# EAGLE board Main_Logic (EAGLE 7.7.0)
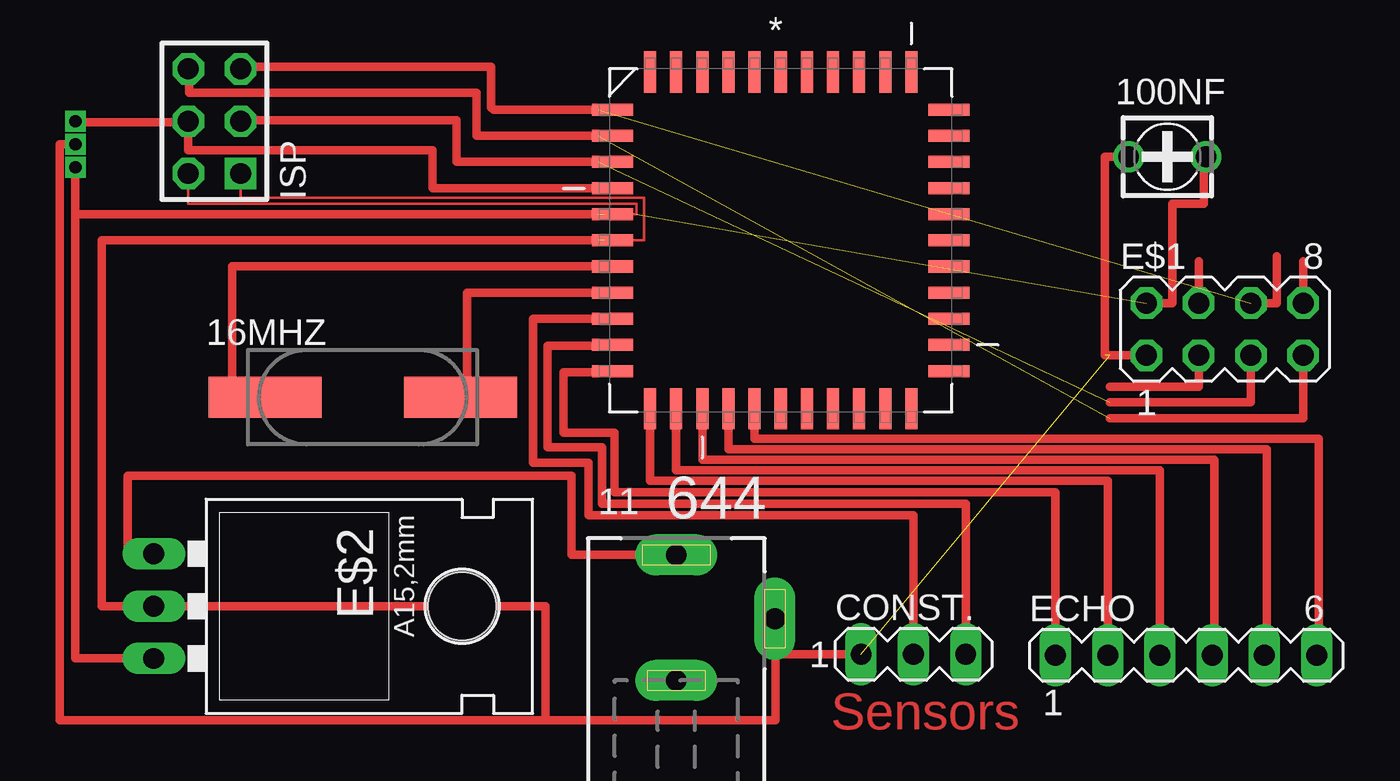
[diagram p0: board, top side]

No outline drawn. Coordinates in mm, seen from the top.
Copper layers (1*16): Top 0.035mm / dielectric 1.5mm / Bottom 0.035mm
Design rules "default": minimum track width 10mil, minimum drill 24mil, track to track 8mil, track to pad 8mil, pad to pad 8mil, via to via 8mil, smd to smd 8mil, copper to edge 40mil, drill to drill 8mil, minimum pad ring 10mil, minimum via ring 8mil, stop-mask expansion 4mil, vias tented up to drill 0mil, thermal gap 10mil

## Footprints (pad centres in the part's own frame; a part is rotated, then mirrored left to right if it is on the bottom)
DCJ0202 = drill 1 pad 2 long: 1 0,3.1; 2 4.8,0; 3 0,-3
CSM-7X-DU = smd 5.5 x 2: 1 -4.75,0; 2 4.75,0
3008 = drill 1: + -1.875,0; - 1.875,0
PLCC127P1752X1752X457-44N = smd 0.584 x 2.007: 1 0,8.179; 2 -1.27,8.179; 3 -2.54,8.179; 4 -3.81,8.179; 5 -5.08,8.179; 6 -6.35,8.179; 18 -6.35,-8.179; 19 -5.08,-8.179; 20 -3.81,-8.179; 21 -2.54,-8.179; 22 -1.27,-8.179; 23 0,-8.179; 24 1.27,-8.179; 25 2.54,-8.179; 26 3.81,-8.179; 27 5.08,-8.179; 28 6.35,-8.179; 40 6.35,8.179; 41 5.08,8.179; 42 3.81,8.179; 43 2.54,8.179; 44 1.27,8.179 | smd 2.007 x 0.584: 7 -8.179,6.35; 8 -8.179,5.08; 9 -8.179,3.81; 10 -8.179,2.54; 11 -8.179,1.27; 12 -8.179,0; 13 -8.179,-1.27; 14 -8.179,-2.54; 15 -8.179,-3.81; 16 -8.179,-5.08; 17 -8.179,-6.35; 29 8.179,-6.35; 30 8.179,-5.08; 31 8.179,-3.81; 32 8.179,-2.54; 33 8.179,-1.27; 34 8.179,0; 35 8.179,1.27; 36 8.179,2.54; 37 8.179,3.81; 38 8.179,5.08; 39 8.179,6.35
MA03-1 = drill 1.016 long: 1 -2.54,0; 2 0,0; 3 2.54,0
MA04-2 = drill 1.016 octagon: 1 -3.81,-1.27; 2 -3.81,1.27; 3 -1.27,-1.27; 4 -1.27,1.27; 5 1.27,-1.27; 6 1.27,1.27; 7 3.81,-1.27; 8 3.81,1.27
78XXL = drill 1.016 long: GND 0,-3.81; IN -2.54,-3.81; OUT 2.54,-3.81 | hole 3.302: 0,11.176
MA06-1 = drill 1.016 long: 1 -6.35,0; 2 -3.81,0; 3 -1.27,0; 4 1.27,0; 5 3.81,0; 6 6.35,0
AVR-ISP-6 = drill 1.016 square: 1 -2.54,-1.27 | drill 1.016 octagon: 2 -2.54,1.27; 3 0,-1.27; 4 0,1.27; 5 2.54,-1.27; 6 2.54,1.27

## Placement (x,y rotation side)
11  [DCJ0202]  26.67,4.47 0 top
16MHZ  [CSM-7X-DU]  11.43,15.24 0 top
100NF  [3008]  50.55,26.92 0 top
644  [PLCC127P1752X1752X457-44N]  31.75,22.86 0 top
CONST.  [MA03-1]  38.2,2.74 0 top
E$1  [MA04-2]  53.34,18.54 0 top
E$2  [78XXL]  5.08,5.08 270 top
ECHO  [MA06-1]  51.46,2.69 0 top
ISP  [AVR-ISP-6]  4.22,28.65 90 top

## Library data of the parts
11 = con-jack
16MHZ = crystal
100NF = c-trimm
644 = Atmel_By_element14_Batch_1-00
CONST. E$1 ECHO = con-lstb
E$2 = v-reg
ISP = avr-4

## Nets
CE: E$1.3
CSN: E$1.4
GND: CONST..1 E$1.1 E$2.GND ISP.1
IN: E$2.IN
IRQ: E$1.8
MISO: E$1.7
MOSI: E$1.6
RES: ISP.4
S$8: CONST..3
S$15: ECHO.3
S$16: ECHO.1
SCK: E$1.5
VCC: E$1.2 E$2.OUT

## Tracks (layer width: path | path; a pad name or v marks a point on that pad's centre or on a via)
CE
  Top 0.406: E$1.3 52.07,15.75 47.75,15.75
CSN
  Top 0.406: E$1.4 52.07,21.84
GND  (3 unrouted)
  Top 0.127: 23.22,22.86 25.09,22.86 25.09,24.94 5.49,24.94 ISP.1
  Top 0.406: 22.86,22.86 -1.27,22.86 -1.27,5.08 E$2.GND 20.32,5.08 20.32,-0.46 | 20.32,-0.46 31.5,-0.46 31.5,2.74 | 31.5,2.74 31.5,4.37 | 20.32,-0.46 -3.3,-0.46 -3.3,27.53 -2.49,27.53 | CONST..1 31.5,2.74 | E$1.1 47.5,17.27 47.5,26.92 48.77,26.92
IN
  Top 0.406: E$2.IN 0,7.62 0,11.43 21.59,11.43 21.59,7.57 26.67,7.57
IRQ
  Top 0.406: E$1.8 57.15,21.84
MISO  (1 unrouted)
  Top 0.406: 22.86,27.94 16.97,27.94 16.97,28.75 16.97,29.11 16.97,30.02 | E$1.7 57.15,14.22 47.75,14.22
MOSI  (1 unrouted)
  Top 0.406: 22.86,29.21 17.78,29.21 | E$1.6 55.88,19.81 55.88,22.1
RES
  Top 0.406: 22.86,25.4 14.83,25.4 14.83,27.23 2.95,27.23 ISP.4
S$1
  Top 0.406: 2.9,28.6 -2.54,28.6
S$2  (via drill 0.6)
  other vias: -2.54,28.65
S$3  (via drill 0.6)
  other vias: -2.54,27.53
S$4  (via drill 0.6)
  other vias: -2.54,26.42
S$5
  Top 0.406: 5.49,31.29 17.68,31.29 17.68,29.31
S$6
  Top 0.406: 3,31.19 3,30.02 16.92,30.02
S$7
  Top 0.406: 23.06,19.05 19.71,19.05 19.71,12.04 22.4,12.04 22.4,9.5 31.24,9.5 31.55,9.5 38.2,9.5 38.2,2.69
S$8
  Top 0.406: 23.16,17.73 20.42,17.73 20.42,12.8 23.06,12.8 23.06,10.06 30.89,10.06 31.39,10.06 40.74,10.06 CONST..3
S$9
  Top 0.406: 23.16,16.46 21.18,16.46 21.18,13.51 23.67,13.51 23.67,10.62 45.11,10.62
S$10
  Top 0.406: 27.94,14.22 27.94,12.19 52.83,12.19 52.83,2.54
S$11
  Top 0.406: 29.21,14.22 29.21,12.7 55.37,12.7 55.37,2.54
S$12
  Top 0.406: 30.48,14.22 30.48,13.21 57.91,13.21 57.91,2.54
S$13
  Top 0.406: 25.4,14.28 25.35,14.28
S$14
  Top 0.406: 25.4,14.38 25.4,11.18 47.65,11.18 47.65,2.59
S$15
  Top 0.406: 26.67,14.28 26.67,11.68 50.19,11.68 ECHO.3
S$16
  Top 0.406: 45.11,10.52 ECHO.1
SCK  (1 unrouted)
  Top 0.406: 22.86,26.67 16,26.67 16,28.7 5.44,28.7 | E$1.5 54.61,14.99 47.75,14.99
VCC  (2 unrouted)
  Top 0.127: 23.16,24.13 24.74,24.13 24.74,24.64 2.95,24.64 2.95,26.06
  Top 0.406: E$2.OUT -2.54,2.54 -2.54,24.13 | 22.86,24.13 -2.54,24.13 | -2.59,26.42 -2.54,26.42 -2.54,24.13 | E$1.2 50.8,19.81 50.8,24.64 52.32,24.64 52.32,26.92
XTAL2
  Top 0.406: 22.86,21.59 5.08,21.59 5.08,15.24
XTAL3
  Top 0.406: 22.86,20.32 19.05,20.32 17.78,20.32 16.51,20.32 16.51,15.24

## Text on the board
Top: Sensors